# EAGLE board TinyDuino (EAGLE 7.1.0)
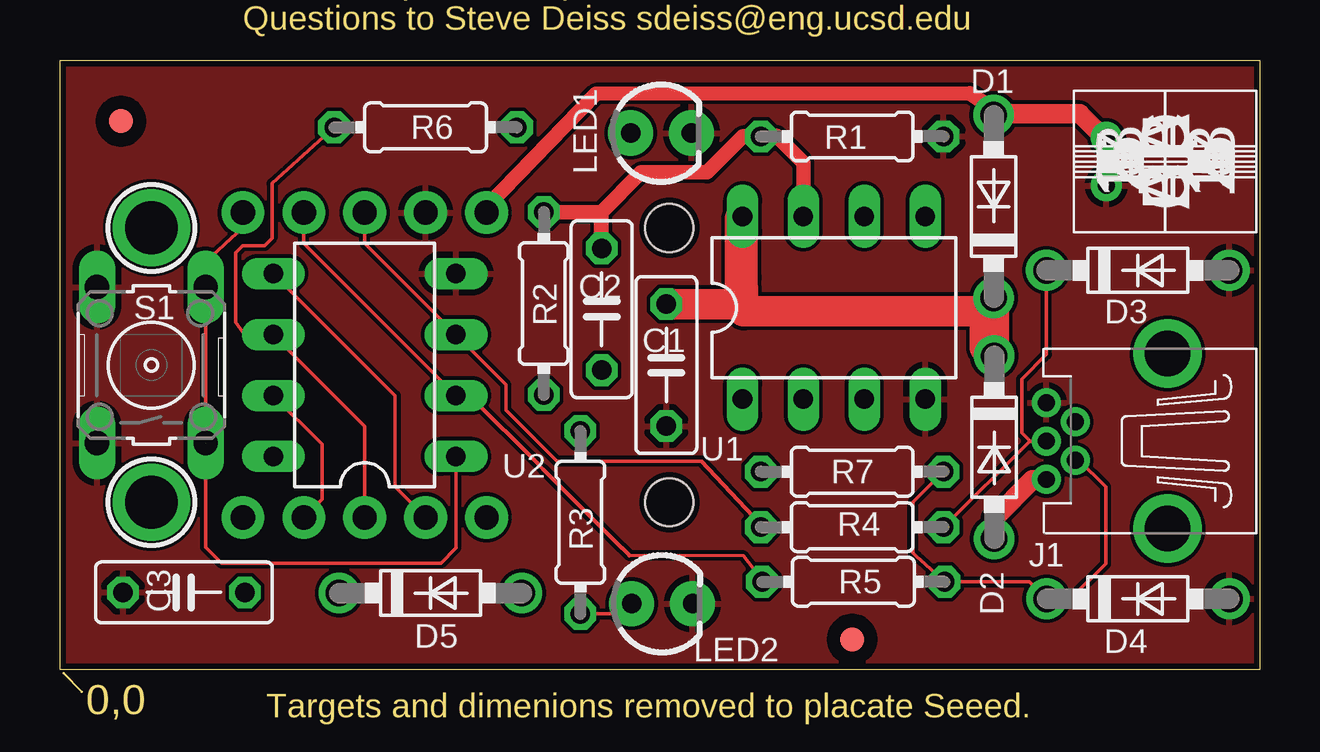
[diagram p0: board, top side]
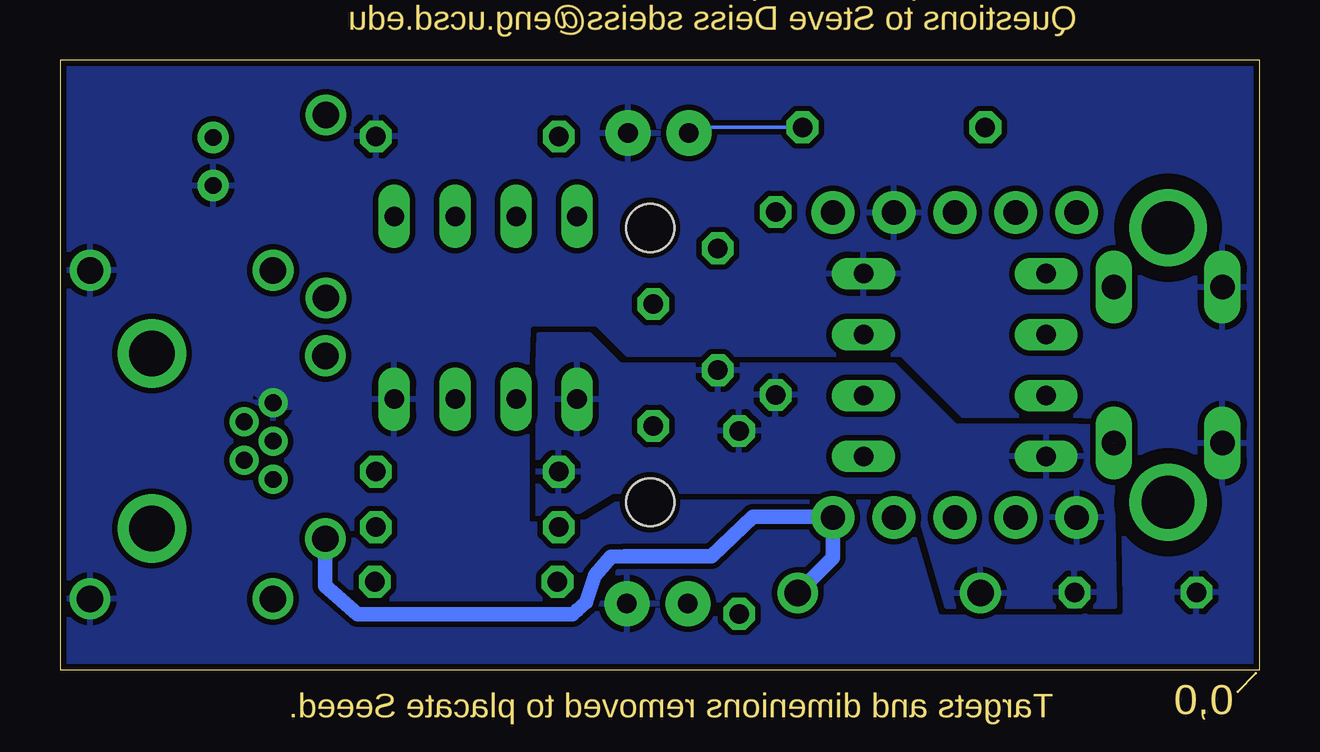
[diagram p1: board, bottom side, seen from below]

Size 50 x 26.32 mm. Coordinates in mm from the lower left corner, seen from the top.
Outline: 0.15,0.76 0.91,0
Outline: 0,0.91 0,26.31 50,26.32 50,0.91 0,0.91
Copper layers (1*16): Top 0.035mm / dielectric 1.5mm / Bottom 0.035mm
Design rules "default *": minimum track width 6mil, minimum drill 24mil, track to track 6mil, track to pad 6mil, pad to pad 6mil, via to via 6mil, smd to smd 6mil, copper to edge 10mil, drill to drill 8mil, minimum pad ring 10mil, minimum via ring 8mil, stop-mask expansion 4mil, vias tented up to drill 0mil, thermal gap 10mil
Net classes: 1 power: width 0.305 mm
Holes 2 mm at 25.4,19.33 25.4,7.9

## Footprints (pad centres in the part's own frame; a part is rotated, then mirrored left to right if it is on the bottom)
C050-025X075 = drill 0.813 octagon: 1 -2.54,0; 2 2.54,0
DO41-7.6 = drill 1.1 pad 1.7: A 3.81,0; C -3.81,0
32005-601-ROUND = drill 0.7 pad 1.016: 1 -2.825,-1.6; 2 -1.625,-0.8; 3 -2.825,0; 4 -1.625,0.8; 5 -2.825,1.6 | drill 1.9 pad 2.54: M1 2.225,-3.65; M2 2.225,3.65
JST_S2B_PH_KL = drill 0.7 pad 1.3: 1 1.95,1.35; 2 3.95,1.35
1X04-CLEANBIG = drill 1.016 pad 1.778: 1 -3.81,0; 2 -1.27,0; 3 1.27,0; 4 3.81,0
1X01-CLEANBIG = drill 1.016 pad 1.778: 1 0,0
LED3MM = drill 0.813 pad 1.88: A -1.27,0; K 1.27,0
0204/7 = drill 0.813 octagon: 1 -3.81,0; 2 3.81,0
B3F-10XX = drill 1.016 long: 1 -3.251,2.261; 2 3.251,2.261; 3 -3.251,-2.261; 4 3.251,-2.261
DIL08 = drill 0.813 long: 1 -3.81,-3.81; 2 -1.27,-3.81; 3 1.27,-3.81; 4 3.81,-3.81; 5 3.81,3.81; 6 1.27,3.81; 7 -1.27,3.81; 8 -3.81,3.81
MOUNTINGHOLE_2.0_PLATED = drill 2.2 pad 3: P$1 0,0
FIDUCIAL_1MM = smd 1 x 1: 1 0,0

## Placement (x,y rotation side)
C1  3.3uF 50V  [C050-025X075]  25.27,13.61 270 top
C2  100pF 50V  [C050-025X075]  22.58,15.94 90 top
C3  3.3uF 50V  [C050-025X075]  5.17,4.14 180 top
D1  Schottky MicroCom 1N5817-TP  [DO41-7.6]  38.92,20.22 90 top
D2  Schottky MicroCom 1N5817-TP  [DO41-7.6]  38.94,10.19 270 top
D3  Fairchild 1N4729A 3.6V  [DO41-7.6]  44.93,17.56 0 top
D4  Fairchild 1N4729A 3.6V  [DO41-7.6]  44.94,3.87 0 top
D5  Schottky MicroCom 1N5817-TP  [DO41-7.6]  15.44,4.11 0 top
J1  MOLEX_USB_MINIB  [32005-601-ROUND]  43.94,10.45 0 top
J2  JST-S2B-PH-KL  [JST_S2B_PH_KL]  42.27,25.04 270 top
J3  1X4-CLEANBIG  [1X04-CLEANBIG]  11.43,19.96 0 top
J4  1X4-CLEANBIG  [1X04-CLEANBIG]  11.43,7.26 0 top
J5  [1X01-CLEANBIG]  17.78,19.96 0 top
J6  [1X01-CLEANBIG]  17.78,7.26 0 top
LED1  Red Lumex SSL-LX3044ID  [LED3MM]  25.05,23.28 0 top
LED2  Green Lumex SSL-LX3044GD  [LED3MM]  25.1,3.67 0 top
R1  100K  [0204/7]  33.02,23.14 180 top
R2  305K  [0204/7]  20.17,16.18 270 top
R3  470  [0204/7]  21.69,7.06 90 top
R4  68  [0204/7]  33.02,6.86 0 top
R5  68  [0204/7]  33.07,4.58 0 top
R6  470  [0204/7]  15.24,23.52 0 top
R7  1.5K  [0204/7]  33.02,9.17 0 top
S1  OMRON B3F-1000  [B3F-10XX]  3.81,13.61 90 top
U1  MIC2951-03YN 5V, 1.24V-29V, 150ma  [DIL08]  32.26,16 0 top
U2  ATtiny 25,45,85 -20PU (2,4,8K, 20MHz, 2.7-5V)  [DIL08]  12.7,13.61 90 top
Z1  MOUNTINGHOLE2.0  [MOUNTINGHOLE_2.0_PLATED]  3.81,7.9 180 top
Z2  MOUNTINGHOLE2.0  [MOUNTINGHOLE_2.0_PLATED]  3.81,19.33 0 top
Z3  FIDUCIAL  [FIDUCIAL_1MM]  33.02,2.18 0 top
Z4  FIDUCIAL  [FIDUCIAL_1MM]  2.54,23.77 0 top

## Library data of the parts
C1 C3 = resistor; DIST-1: DigiKey; DIST-1-PN: 445-8459-ND; MFR: TDK; PARTNO: FK20X7R1H335K; TOL: 10%; VOLT: 50V
C2 = resistor; DIST-1: DigiKey; DIST-1-PN: 445-4726-ND; MFR: TDK; PARTNO: FK28C0G1H101J; TOL: 10%; VOLT: 50V
D1 D2 D5 = diode; DIST-1: DigiKey; DIST-1-PN: 1N5817-TPCT-ND; MFR: Micro Com.; PARTNO: 1N5817-TP; TYPE: Schottky
D3 D4 = diode; DIST-1: DigiKey; DIST-1-PN: 1N4729AFS-ND; MFR: Fairchild; PARTNO: 1N4729A; TYPE: Zener
J1 = Trinket TH; DIST-1: DigiKey; DIST-1-PN: WM17115-ND; MFR: Molex; PARTNO: 0548190519
J2 = Adafruit Trinket 5V; DIST-1: DigiKey; DIST-1-PN: 455-1719-ND; MFR: JST; PARTNO: JST_S2B_PH_KL
J3-J6 Z3 Z4 = adafruit; BOM: EXCLUDE; DNP: T
LED1 = SparkFun-LED; COLOR: RED; DIST-1: DigiKey; DIST-1-PN: 67-1066-ND; MFR: Lumex; PARTNO: SSL-LX3044ID
LED2 = SparkFun-LED; COLOR: GREEN; DIST-1: DigiKey; DIST-1-PN: 67-1060-ND; MFR: Lumex; PARTNO: SSL-LX3044GD
R1 = Adafruit Trinket 5V; DIST-1: DigiKey; DIST-1-PN: 100KXBK-ND; MFR: Yageo; PARTNO: MFR-25FBF52-100K; RATE: 1/4W; TOL: 1%
R2 = Adafruit Trinket 5V; DIST-1: DigiKey; DIST-1-PN: 301KXBK-ND; MFR: Yageo; PARTNO: MFR-25FBF52-301K; PLACE: for 5V only; RATE: 1/4W; TOL: 1%
R3 R6 = Adafruit Trinket 5V; DIST-1: DigiKey; DIST-1-PN: 470EBK-ND; MFR: Yageo; PARTNO: CFR-12JB-52-470R; RATE: 1/6W; TOL: 5%
R4 R5 = Adafruit Trinket 5V; DIST-1: DigiKey; DIST-1-PN: 68EBK-ND; MFR: Yageo; PARTNO: CFR-12JB-52-68R; RATE: 1/6W; TOL: 5%
R7 = Adafruit Trinket 5V; DIST-1: DigiKey; DIST-1-PN: 1.5KEBK-ND; MFR: Yageo; PARTNO: CFR-12JB-52-1K5; RATE: 1/6W; TOL: 5%
S1 = switch-omron; DIST-1: DigiKey; DIST-1-PN: SW400-ND; MFR: Omron; PARTNO: B3F-1000
U1 = Adafruit Trinket 5V TH; DIST-1: DigiKey; DIST-1-PN: 576-1150-ND; MFR: Micrel; PARTNO: MIC2951-03YN
U2 = Trinket TH; DIST-1: DigiKey; DIST-1-PN: ATTINY85-20PU-ND; MFR: Atmel; PARTNO: ATTINY85-20PU-ND
Z1 Z2 = microbuilder; BOM: EXCLUDE; DNP: T

## Nets
B0: J4.4 U2.5
B1: J4.3 R6.1 U2.6
B2: J4.2 U2.7
B3: J3.2 R5.1 U2.2
B4: J3.3 R4.1 U2.3
D+: D3.C J1.3 R4.2
D-: D4.C J1.2 R5.2 R7.2
GND: C1.2 C3.2 D3.A D4.A J1.5 J2.2 J3.4 LED1.K LED2.K R1.1 S1.1 S1.2 U1.4 U2.4
N$1: LED1.A R6.2
N$3: LED2.A R3.1
N$4: C2.2 R1.2 R2.1 U1.7
RESETN: J3.1 S1.3 S1.4 U2.1
VBAT: D1.A J2.1 J5.1
VBUS: D2.A D5.A J1.1 J6.1
VCC: C2.1 C3.1 D5.C J4.1 R2.2 R3.2 R7.1 U1.1 U2.8
VIN: C1.1 D1.C D2.C U1.8

## Tracks (layer width: path | path; a pad name or v marks a point on that pad's centre or on a via)
B0
  Top 0.152: J4.4 13.97,8.53 13.97,12.34 U2.5
B1
  Top 0.152: R6.1 8.84,21.18 8.84,18.9 8.53,18.59 7.62,18.59 7.32,18.29 7.32,15.39 7.69,14.89 8.76,14.89 8.76,14.88 U2.6 12.7,11.07 J4.3
B2
  Top 0.152: J4.2 10.92,8.03 10.92,10.31 U2.7
B3
  Top 0.152: R5.1 29.26,4.67 28.5,5.66 23.73,5.68 | 20.14,9.27 19.96,9.45 | U2.2 10.16,18.69 J3.2
  Top 0.165: 19.96,9.45 17.09,12.32 16.53,12.32 U2.2 | 20.14,9.27 20.14,9.26 23.41,5.99 23.4,6.01 23.73,5.68
B4
  Top 0.152: 26.75,9.6 20.73,9.6 18.59,11.73 18.59,12.8 U2.3 12.7,18.69 J3.3
  Top 0.165: 26.75,9.6 29.21,6.96 R4.1
D+
  Top 0.152: R4.2 40.42,10.45 J1.3 40.42,10.45 | 40.42,10.45 40.42,10.43 | 40.42,10.45 40.42,10.46 40.09,10.79 40.09,13.02 41.12,14.05 D3.C
D-
  Top 0.152: R7.2 35.56,7.9 35.56,5.79 35.7,5.65 R5.2 40.41,4.58 D4.C 41.19,3.81 42.06,3.81 43.59,5.33 43.59,8.53 42.47,9.65 J1.2
GND
  pour Bottom (isolate 0.23, rank 2): 0,26.31 0,0.91 50.01,0.91 49.98,26.32
  pour Bottom (isolate 0.19, rank 2, no thermals): 40.86,13.13 40.05,12.36 40.05,11.83 41.16,11.83 41.18,11.85 41.18,11.87 41.25,11.85 42.02,12.58 42.03,13.09 41.1,13.23
  pour Top (rank 2): 0,0.91 0,26.31 50,26.33 50.01,0.91
N$1
  Bottom 0.152: R6.2 23.55,23.52 LED1.A
N$3
  Top 0.152: R3.1 23.4,3.25 LED2.A
N$4
  Top 0.61: R2.1 22.52,19.99 22.54,19.96 | 22.54,19.96 22.54,18.52 C2.2 22.58,19.93 22.54,19.96 | 22.54,19.96 24.22,21.64 26.98,21.64 28.47,23.14 R1.2 29.23,23.16 29.87,23.16 30.99,22.05 U1.7
RESETN  (1 unrouted)
  Top 0.152: J3.1 7.62,19.33 6.1,17.93 6.07,17.91 S1.4 S1.3 | U2.1 16.51,5.99 15.88,5.36 6.73,5.36 6.07,6.02 S1.3
VBAT
  Top 0.61: D1.A 38.92,24.26 37.94,24.94 22.35,24.92 17.78,20.22 J5.1
  Top 0.813: J2.1 43.5,23.09 42.52,24.08 39.27,24.08 D1.A
VBUS
  Top 0.813: J1.1 40.54,8.84 38.94,7.24 D2.A
  Bottom 0.406: 38.86,6.25 38.94,4.42
  Bottom 0.61: D2.A 38.94,4.42 37.59,3.22 28.63,3.22 28.45,3.41 28.07,3.72 27.7,4.85 27.02,5.63 26.47,5.64 22.84,5.64 21.11,7.29 17.8,7.29 J6.1 17.78,5.59 D5.A
VCC
  pour Bottom (isolate 0.23): 12.7,11.07 7.62,11.07 6.17,11.02 6.05,3.57 13.03,3.57 14.43,8.36 26.97,8.36 28.55,7.39 30.07,7.39 30.07,13.61 30.02,14.88 27.94,14.88 26.67,13.61 15.24,13.61
VIN
  Top 1.27: D2.C 38.92,14.02 D1.C 38.56,16.05 38.56,14.33 38.86,14.63 38.86,15.24 38.25,15.85 28.5,15.85 28.45,17.27 U1.8 28.35,19.71 28.35,16.15 C1.1

## Text on the board
Dimension: UCSD (NVSL Lab) Trinket, TH Rev A, 9/14 / Questions to Steve Deiss sdeiss@eng.ucsd.edu | 0,0 | Targets and dimenions removed to placate Seeed.
_tsilk: UCSD NVSL Gadgetron | TRINKET | J2 | + | R | 3 | 4 | G | B+ | - | + | - | V+ | 2 | 1 | 0 | U+ | SRD 9/14 - RevA
_bsilk: UCSD NVSL / Gadgetron / TRINKET